# EAGLE board POVUNO (EAGLE 7.6.0)
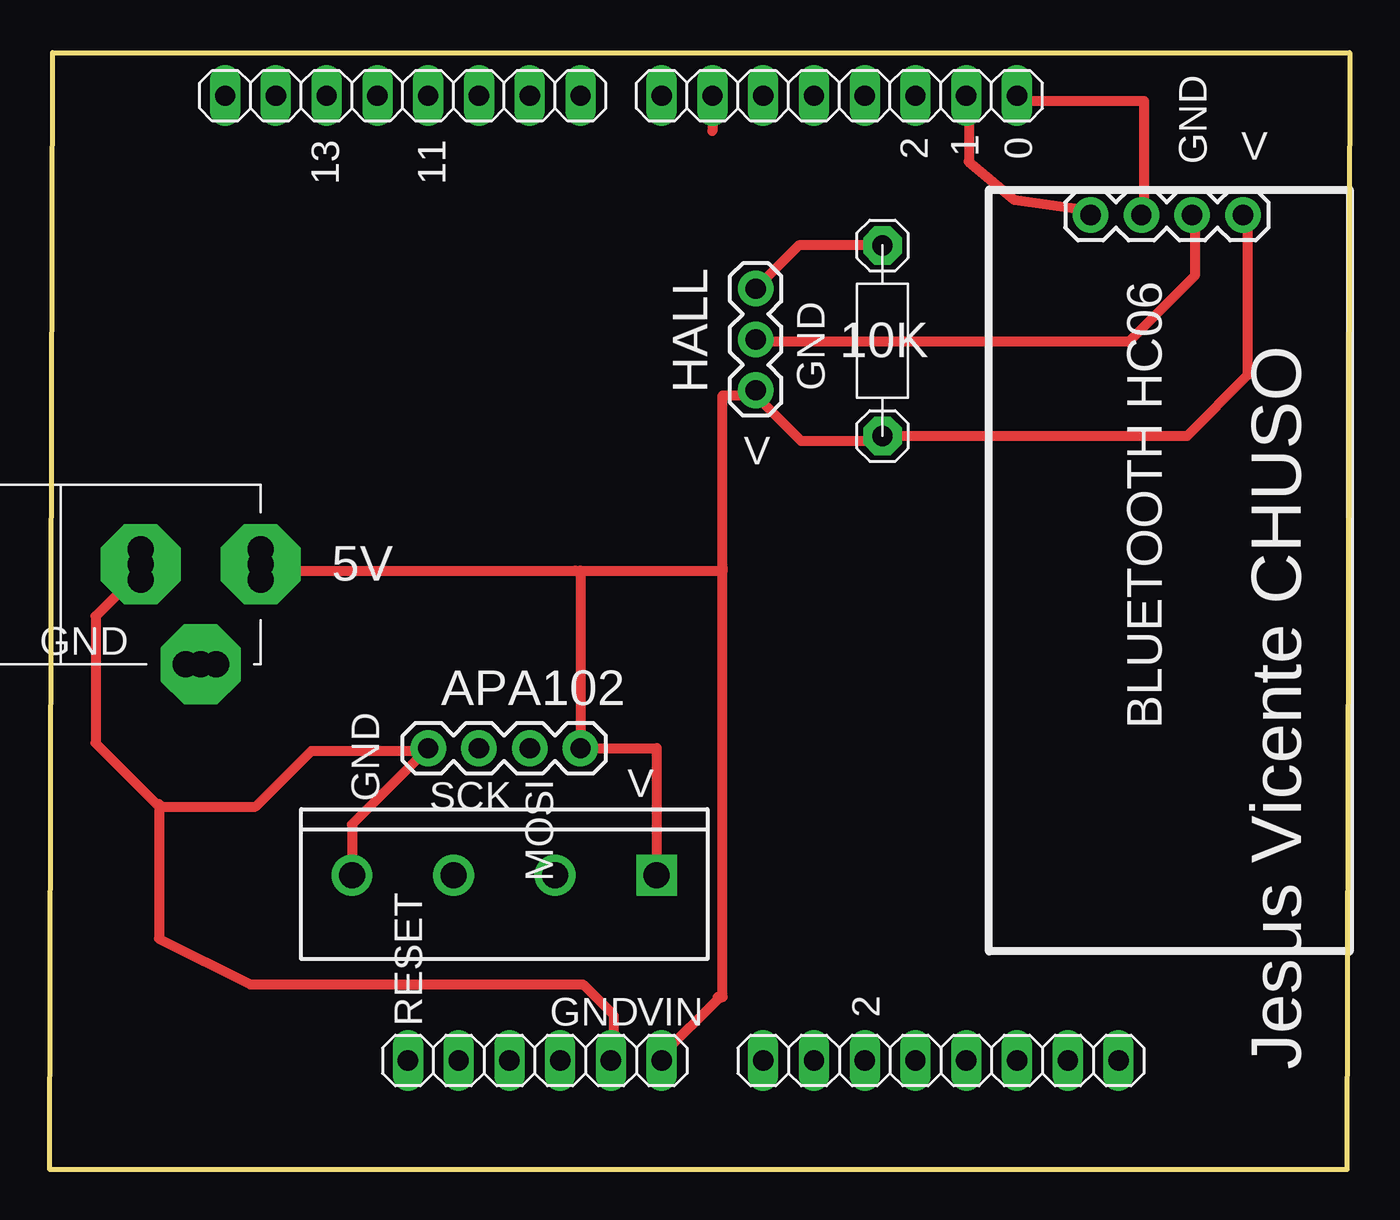
[diagram p0: board, top side]
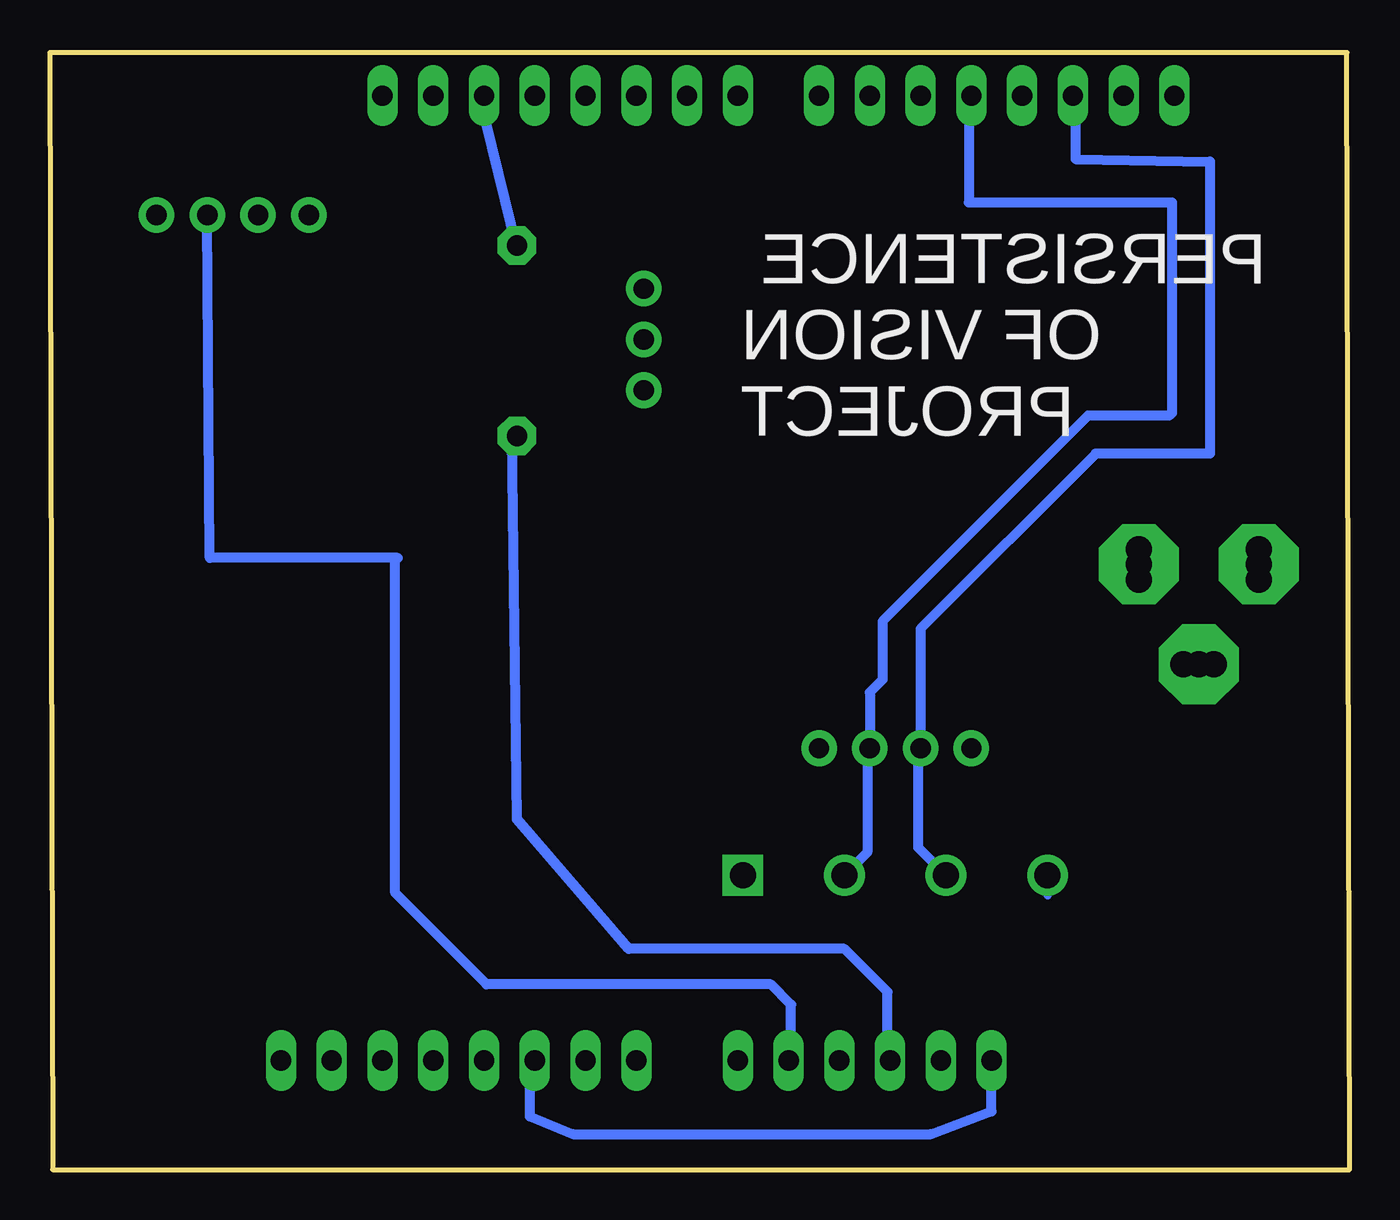
[diagram p1: board, bottom side, seen from below]

Size 65.02 x 55.88 mm. Coordinates in mm from the lower left corner, seen from the top.
Outline: 0.13,55.88 65.02,55.88 64.9,0 0,0 0.13,55.88
Copper layers (1*16): Top 0.035mm / dielectric 1.5mm / Bottom 0.035mm
Design rules "default": minimum track width 10mil, minimum drill 24mil, track to track 8mil, track to pad 8mil, pad to pad 8mil, via to via 8mil, smd to smd 8mil, copper to edge 40mil, drill to drill 8mil, minimum pad ring 10mil, minimum via ring 8mil, stop-mask expansion 4mil, vias tented up to drill 0mil, thermal gap 10mil
Net classes: 1 power: width 0.61 mm, drill 0.61 mm, clearance 0.254 mm; 2 gnd: width 0.305 mm, drill 0.559 mm, clearance 0.254 mm

## Footprints (pad centres in the part's own frame; a part is rotated, then mirrored left to right if it is on the bottom)
1X08 = drill 1.016 long: 1 -8.89,0; 2 -6.35,0; 3 -3.81,0; 4 -1.27,0; 5 1.27,0; 6 3.81,0; 7 6.35,0; 8 8.89,0
PIN3UD = drill 1.016 pad 1.778: 1 0,0; 2 2.54,0; 3 5.08,0
PIN4UD = drill 1.016 pad 1.778: 1 0,0; 2 2.54,0; 3 5.08,0; 4 7.62,0
POWERSUPPLY_DC-21MM = drill 1.3 pad 4 octagon: 1 -5.08,-3.353; 2 -0.076,-6.35; 3 -0.076,-0.356 | drill 1.3: 4 -5.08,-4.115; 5 -5.08,-2.591; 6 -0.838,-0.356; 7 0.686,-0.356; 8 -0.838,-6.35; 9 0.686,-6.35
SCREWBLOCK5MM_4U = drill 1.3 pad 2.032 square: 1 0,0 | drill 1.3 pad 2.032: 2 5.08,0; 3 10.16,0; 5 15.24,0
RESISTENCIA_GENERICA = drill 1.016 pad 1.93 octagon: 1 0,0; 2 9.525,0
1X06 = drill 1.016 long: 1 -6.35,0; 2 -3.81,0; 3 -1.27,0; 4 1.27,0; 5 3.81,0; 6 6.35,0

## Placement (x,y rotation side)
ADCL1  [1X08]  44.58,5.46 0 top
E$1  [PIN3UD]  35.31,44.07 270 top
E$2  [PIN4UD]  52.07,47.75 0 top
E$3  [POWERSUPPLY_DC-21MM]  4.19,30.35 90 top
E$4  [SCREWBLOCK5MM_4U]  30.35,14.73 180 top
E$10  [PIN4UD]  26.54,21.08 180 top
E$15  [RESISTENCIA_GENERICA]  41.66,36.7 90 top
POWER1  [1X06]  24.26,5.46 0 top
PWMH1  [1X08]  17.65,53.72 180 top
PWML1  [1X08]  39.5,53.72 180 top

## Library data of the parts
ADCL1 POWER1 PWMH1 PWML1 = pinhead
E$1 E$2 E$4 E$10 E$15 = chuso
E$3 = SmartPrj

## Nets
S$1: E$4.1 E$10.1
S$16: E$4.5 E$10.4
S$19: E$4.2
S$28: POWER1.1

## Tracks (layer width: path | path; a pad name or v marks a point on that pad's centre or on a via)
S$1
  Top 0.508: 10.03,29.97 26.29,29.97 26.54,29.97 | 26.54,29.97 E$10.1 30.35,21.08 E$4.1 | 33.4,8.64 33.66,8.64 33.66,29.97 | 35.31,38.73 33.66,38.73 33.66,30.1 33.66,29.97 | 26.54,29.97 33.66,29.97
S$2
  Top 0.508: 48.51,53.47 54.74,53.47 54.74,47.88
S$3
  Top 0.508: 41.91,36.7 56.9,36.7 59.94,39.75 59.94,47.75
  Bottom 0.508: 23.11,5.33 23.11,8.89 25.27,11.05 36.07,11.05 41.66,17.53 41.91,36.7
S$4
  Top 0.508: 4.57,30.23 4.57,29.97 2.29,27.69 2.29,21.34 5.46,18.16 10.29,18.16 13.08,20.95 18.92,20.95 19.18,21.21
S$5
  Top 0.508: 57.28,47.62 57.28,44.7 53.98,41.4 35.18,41.4 34.93,41.66
S$6
  Top 0.508: 41.91,36.45 37.59,36.45 35.43,38.61
S$7
  Top 0.508: 33.15,53.59 33.27,53.59
S$8
  Top 0.508: 30.61,53.59 30.48,53.59
S$9
  Top 0.508: 45.97,53.47 45.97,50.42 48.26,48.51 51.82,48.01 52.2,47.62
S$10
  Top 0.508: 41.91,46.23 37.47,46.23 35.18,43.94
S$11
  Top 0.508: 33.15,53.47 33.15,51.94
S$12
  Bottom 0.508: 27.81,5.97 27.94,5.97 27.94,8.25 28.96,9.27 43.18,9.27 47.75,13.84 47.75,30.61
S$13
  Bottom 0.508: 43.56,53.72 41.66,45.97
S$14
  Bottom 0.508: 13.72,53.72 13.72,50.55 6.98,50.42 6.98,35.81 12.7,35.81 21.46,27.05 21.46,21.21
S$15
  Bottom 0.508: 19.05,53.85 19.05,48.39 8.89,48.39 8.89,37.85 9.02,37.72 13.08,37.72 23.37,27.43 23.37,24.51 24,23.88 24,21.21
S$16
  Top 0.508: E$10.4 15.11,17.27 E$4.5
S$17
  Top 0.508: 5.46,18.29 5.46,11.56 10.03,9.27 26.67,9.27 28.19,7.75 28.19,4.95
S$18
  Bottom 0.508: 21.59,21.08 21.59,16.13 20.07,14.6
S$19
  Bottom 0.508: 24.13,20.83 24.13,15.88 E$4.2
S$25
  Bottom 0.508: 47.62,30.61 57.02,30.61 57.15,47.62
S$28
  Bottom 0.508: 41.02,5.84 41.02,2.67 38.86,1.78 20.96,1.78 17.91,2.92 POWER1.1
S$33
  Top 0.508: 30.73,5.46 30.73,5.59 30.61,5.71 33.53,8.64
S$34
  Bottom 0.406: 15.11,14.48 15.11,13.72

## Text on the board
tPlace: 2 | 1 | 0 | 13 | 11 | 2
tNames: GND | V | BLUETOOTH HC06 | GND | 10K | HALL | V | 5V | GND | APA102 | Jesus Vicente CHUSO | SCK | MOSI | V | GND | RESET | GND | VIN
bNames: PERSISTENCE / OF VISION / PROJECT